# Altium PCB Interface.PcbDoc
Units mil, origin at the board's own origin, x right, y up, seen from the top; angles counter-clockwise.
Board outline 9055.12 x 3940 mil, 2 copper layers (Top Layer, Bottom Layer); 34 components, 85 nets, 292 pads, 110 vias.
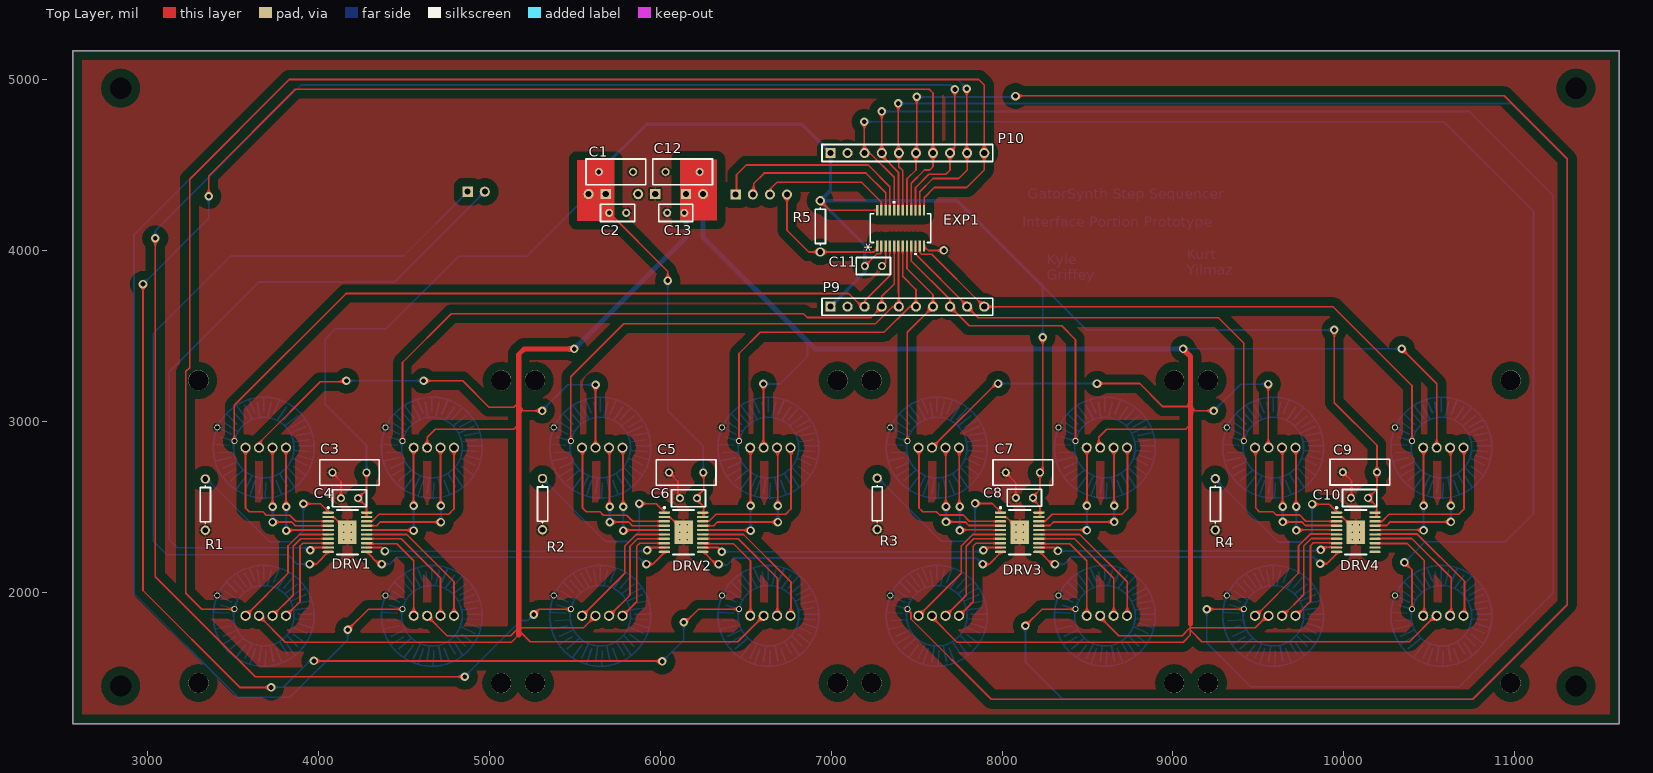
[diagram p0: Top Layer view]
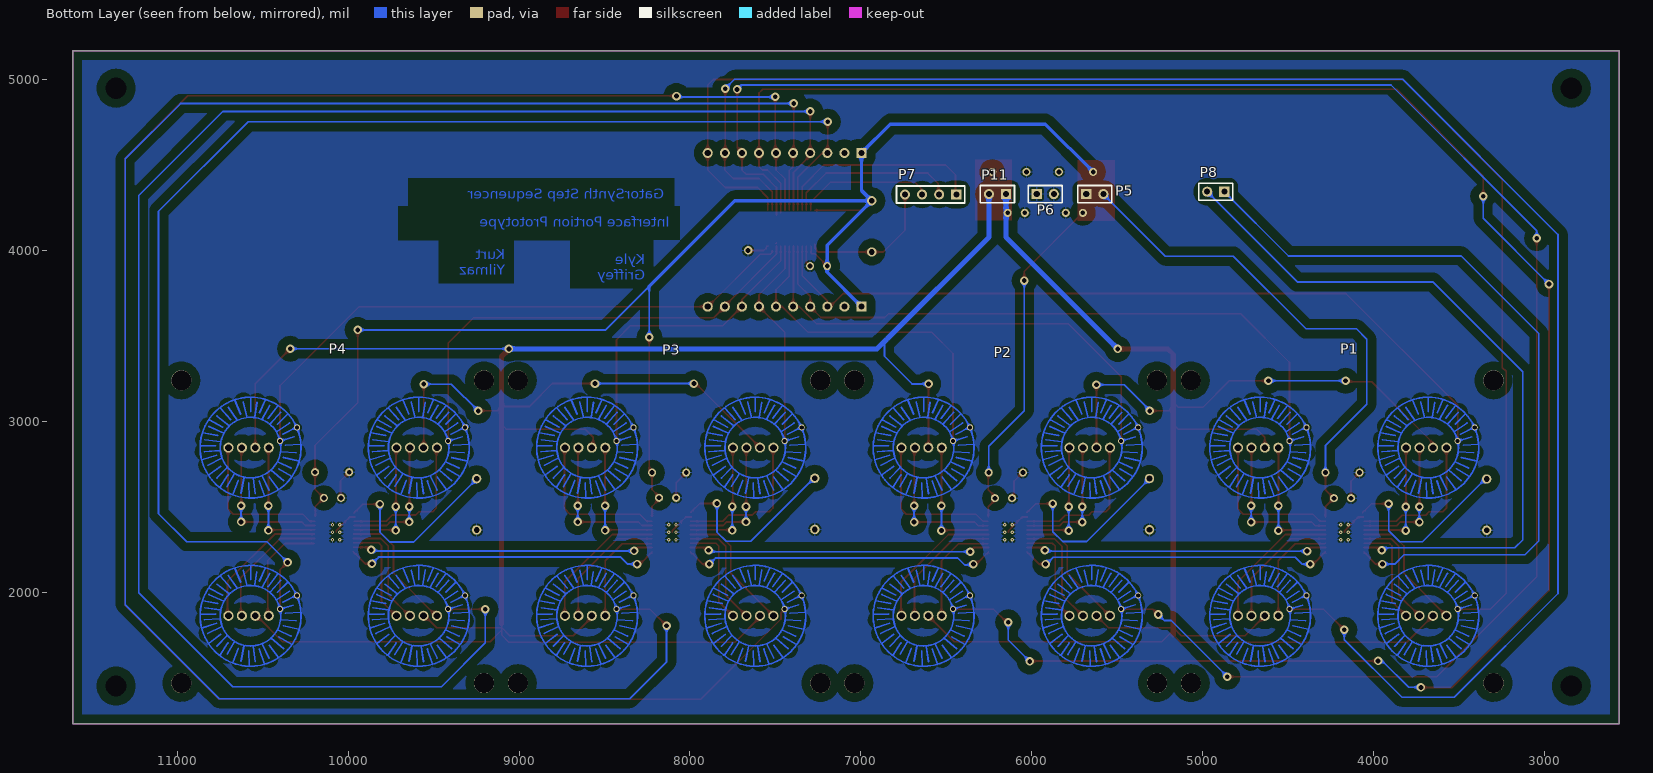
[diagram p1: Bottom Layer view, seen from below]

## Layer stack, top to bottom
Top Solder: solder mask 0.4, Solder Resist, Dk 3.5
Top Layer: signal copper 1.4
Dielectric 1: dielectric 12.6, FR-4, Dk 4.8
Bottom Layer: signal copper 1.4
Bottom Solder: solder mask 0.4, Solder Resist, Dk 3.5

## Board outline
2559.06,1230 11614.17,1230 11614.17,5170 2559.06,5170

## Design rules (kind name [scope] priority, off if disabled: settings)
Clearance "Copper pour vs GND" [InPolygon vs InNet('GND')] p1: gap=0 ignorepadtopadclearanceinfootprint=TRUE
Clearance "Copper pour" [InPolygon vs Not InNet(GND)] p2: gap=50 ignorepadtopadclearanceinfootprint=TRUE
Clearance [Not InPolygon vs Not InPolygon] p3: gap=10 ignorepadtopadclearanceinfootprint=TRUE
ComponentClearance Buttons_Clearance [HasFootprint('BUTTONPAD-2X2') vs HasFootprint('BUTTONPAD-2X2')] p1: gap=0 collisioncheckmode=3 verticalgap=0 showdistances=FALSE
ComponentClearance [All] p2: gap=10 collisioncheckmode=3 verticalgap=10 showdistances=FALSE
PolygonConnect [All] p1: connectstyle=Relief reliefconductorwidth=10 reliefentries=4 polygonreliefangle="90 Angle" airgapwidth=10
RoutingVias [All] p1: holewidth=28 width=50 viastyle="Through Hole" minholewidth=28 minwidth=50 maxholewidth=28 maxwidth=50
SolderMaskExpansion [All] p1: expansion=4
Width [All] p1: maxlimit=30 minlimit=10 preferedwidth=10
29 further rules are at their usual default settings.

## Components (designator, comment, footprint, x,y, rotation, side; value= is the part's Value field where it differs from the comment)
C1 "" RAD-0.2 5740,4460 r0 top value=10uF
C2 "Cap" RAD-0.1 5750,4220 r180 top value=".01 uF"
C3 "" RAD-0.2 4180,2700 r180 top value=10uF
C4 "Cap" RAD-0.1 4180,2550 r0 top value=".01 uF"
C5 "" RAD-0.2 6151,2700 r180 top value=10uF
C6 "Cap" RAD-0.1 6164.67,2550 r0 top value=".01 uF"
C7 "" RAD-0.2 8122,2700 r180 top value=10uF
C8 "Cap" RAD-0.1 8131,2552 r0 top value=".01 uF"
C9 "" RAD-0.2 10095,2702 r180 top value=10uF
C10 "Cap" RAD-0.1 10093,2551 r0 top value=".01 uF"
C11 "Cap" RAD-0.1 7247,3909 r0 top value=".047 uF"
C12 "" RAD-0.2 6130,4460 r180 top value=10uF
C13 "Cap" RAD-0.1 6090,4220 r0 top value=".01 uF"
DRV1 "TLC5971PWPR" TI-PWP20-2965X2290TP_N 4167.8,2350.43 r0 top
DRV2 "TLC5971PWPR" TI-PWP20-2965X2290TP_N 6135.6,2350.43 r0 top
DRV3 "TLC5971PWPR" TI-PWP20-2965X2290TP_N 8103.4,2350.43 r0 top
DRV4 "TLC5971PWPR" TI-PWP20-2965X2290TP_N 10071.2,2350.43 r0 top
EXP1 "MAX7314AEGT" 21-0055H_24 7406,4131 r90 top
P1 "BUTTONPAD" BUTTONPAD-2X2 3197.24,1374.25 r0 bottom locked
P2 "BUTTONPAD" BUTTONPAD-2X2 5167.24,1374.25 r0 bottom locked
P3 "BUTTONPAD" BUTTONPAD-2X2 7137.24,1374.25 r0 bottom locked
P4 "BUTTONPAD" BUTTONPAD-2X2 9107.24,1374.25 r0 bottom locked
P5 "VCC" HDR1X2 5680,4330 r180 bottom
P6 "GND" HDR1X2 5970,4330 r180 bottom
P7 "I2C" HDR1X4 6441,4328 r0 bottom
P8 "SPI" HDR1X2 4872,4344 r0 bottom
P9 "2.2k_RES" HDR1X10 6996,3671 r0 top
P10 "2.2k_RES" HDR1X10 6996,4571 r0 top
P11 "12V" HDR1X2 6150,4330 r0 bottom
R1 "R1" AXIAL-0.3 3336,2512 r90 top value=2.5K
R2 "R2" AXIAL-0.3 5310,2515 r90 top value=2.5K
R3 "R3" AXIAL-0.3 7269,2517 r90 top value=2.5K
R4 "R4" AXIAL-0.3 9249,2514 r90 top value=2.5K
R5 "R5" AXIAL-0.3 6936,4141 r90 top value=1K

## Footprints (in the part's own frame and the unit in brackets; to place one, negate y for a bottom-side part, rotate by r counter-clockwise, add the part's x,y. Pads: shape width x height; smd on the part's side, far side on the other; paste and mask are expansions set on the pad)
21-0055H_24 [mil]
  rect 63x14 smd: 1(-104.5,137.5) 2(-104.5,112.5) 3(-104.5,87.5) 4(-104.5,62.5) 5(-104.5,37.5) 6(-104.5,12.5) 7(-104.5,-12.5) 8(-104.5,-37.5) 9(-104.5,-62.5) 10(-104.5,-87.5) 11(-104.5,-112.5) 12(-104.5,-137.5) 13(104.5,-137.5) 14(104.5,-112.5) 15(104.5,-87.5) 16(104.5,-62.5) 17(104.5,-37.5) 18(104.5,-12.5) 19(104.5,12.5) 20(104.5,37.5) 21(104.5,62.5) 22(104.5,87.5) 23(104.5,112.5) 24(104.5,137.5)
  silkscreen extent -156,-177 156,177
AXIAL-0.3 [mm] "Axial Device, Thru-Hole; 2 Leads; 0.3 in Pin Spacing"
  round 1.4 hole 0.85: 1(-3.81,0) 2(3.81,0)
  silkscreen extent -2.77,-0.76 2.77,0.76
BUTTONPAD-2X2 [mm]
  round 3 hole 3: 1(2.508,-47.373) 1(2.508,-2.373) 1(47.508,-47.373) 1(47.508,-2.373)
  round 1.5 hole 1: BLU1(15.508,-37.373) BLU2(40.508,-37.373) BLU3(15.508,-12.373) BLU4(40.508,-12.373) GRN1(13.508,-37.373) GRN2(38.508,-37.373) GRN3(13.508,-12.373) GRN4(38.508,-12.373) RED1(9.508,-37.373) RED2(34.508,-37.373) RED3(9.508,-12.373) RED4(34.508,-12.373) VCC1(11.508,-37.373) VCC2(36.508,-37.373) VCC3(11.508,-12.373) VCC4(36.508,-12.373)
  round 0.9 hole 0.6: SIG1(5.296,-40.386) SIG2(7.836,-38.354) SIG3(30.296,-40.386) SIG4(32.836,-38.354) SIG5(5.296,-15.386) SIG6(7.836,-13.354) SIG7(30.296,-15.386) SIG8(32.836,-13.354)
  Top Layer circle w0.254: c37.208,-12.373 r7.5
  Top Layer circle w0.254: c37.208,-37.373 r7.5
  Top Layer circle w0.254: c12.208,-12.373 r7.5
  Top Layer circle w0.254: c12.208,-37.373 r7.5
  Top Layer lines w0.254: 4.728,-12.883 7.028,-12.743 ; 4.728,-37.883 7.028,-37.743 ; 5.048,-10.393 7.318,-10.903 ; 5.048,-35.393 7.318,-35.903 ; 5.368,-15.413 7.428,-14.373 ; 5.368,-40.413 7.428,-39.373 ; 5.448,-11.623 7.748,-11.763 ; 5.448,-36.623 7.748,-36.763 ; 5.731,-39.014 7.748,-38.373 ; 5.736,-14.012 7.748,-13.373 ; 6.138,-8.123 8.038,-9.243 ; 6.138,-33.123 8.038,-34.243 ; 6.198,-9.353 8.198,-10.293 ; 6.198,-34.353 8.198,-35.293 ; 6.438,-16.033 8.358,-14.753 ; 6.438,-41.033 8.358,-39.753 ; 6.708,-17.373 8.208,-15.873 ; 6.708,-42.373 8.208,-40.873 ; 7.288,-7.453 9.138,-9.003 ; 7.288,-32.453 9.138,-34.003 ; 7.768,-17.613 9.298,-15.923 ; 7.768,-42.613 9.298,-40.923 ; 8.118,-6.203 9.448,-8.003 ; 8.118,-31.203 9.448,-33.003 ; 8.198,-18.573 9.618,-16.733 ; 8.198,-43.573 9.618,-41.733 ; 9.358,-18.653 10.468,-16.673 ; 9.358,-43.653 10.468,-41.673 ; 9.478,-6.063 10.468,-8.153 ; 9.478,-31.063 10.468,-33.153 ; 10.048,-19.483 10.888,-17.553 ; 10.048,-44.483 10.888,-42.553 ; 10.178,-5.293 10.918,-7.423 ; 10.178,-30.293 10.918,-32.423 ; 11.243,-19.166 11.598,-16.943 ; 11.257,-44.081 11.598,-41.943 ; 11.498,-5.533 11.838,-7.803 ; 11.498,-30.533 11.838,-32.803 ; 12.208,-17.743 12.208,-19.833 ; 12.208,-42.743 12.208,-44.833 ; 12.428,-4.933 12.498,-7.163 ; 12.428,-29.933 12.498,-32.163 ; 12.798,-16.993 13.308,-19.163 ; 12.798,-41.993 13.308,-44.163 ; 13.198,-7.913 13.648,-5.613 ; 13.198,-32.913 13.648,-30.613 ; 13.708,-17.393 14.538,-19.403 ; 13.708,-42.393 14.538,-44.403 ; 14.058,-7.493 14.798,-5.563 ; 14.058,-32.493 14.798,-30.563 ; 14.188,-16.463 15.548,-18.383 ; 14.188,-41.463 15.548,-43.383 ; 14.618,-8.473 15.756,-6.604 ; 14.618,-33.473 15.756,-31.623 ; 15.178,-16.513 16.728,-18.283 ; 15.178,-41.513 16.728,-43.283 ; 15.388,-15.633 17.218,-17.073 ; 15.388,-40.633 17.218,-42.073 ; 15.578,-8.313 16.748,-6.573 ; 15.578,-33.313 16.748,-31.573 ; 15.708,-9.433 17.218,-7.853 ; 15.708,-34.433 17.218,-32.853 ; 16.188,-14.533 18.408,-15.523 ; 16.188,-39.533 18.408,-40.523 ; 16.348,-15.423 18.358,-16.493 ; 16.348,-40.423 18.358,-41.493 ; 16.508,-10.773 18.568,-9.753 ; 16.508,-35.773 18.568,-34.753 ; 16.618,-13.233 16.637,-13.235 ; 16.618,-38.233 16.637,-38.236 ; 16.648,-9.593 18.378,-8.313 ; 16.648,-34.593 18.378,-33.313 ; 16.808,-11.943 19.078,-11.783 ; 16.808,-36.943 19.078,-36.783 ; 17.098,-14.193 19.318,-14.613 ; 17.098,-39.193 19.318,-39.613 ; 17.258,-11.253 19.428,-10.553 ; 17.258,-36.253 19.428,-35.553 ; 17.388,-12.643 19.588,-12.613 ; 17.388,-37.643 19.588,-37.613 ; 19.018,-13.553 16.637,-13.235 ; 19.018,-38.553 16.637,-38.236 ; 29.728,-12.883 32.028,-12.743 ; 29.728,-37.883 32.028,-37.743 ; 30.048,-10.393 32.318,-10.903 ; 30.048,-35.393 32.318,-35.903 ; 30.368,-15.413 32.428,-14.373 ; 30.368,-40.413 32.428,-39.373 ; 30.448,-11.623 32.748,-11.763 ; 30.448,-36.623 32.748,-36.763 ; 30.748,-39.008 32.748,-38.373 ; 30.906,-13.958 32.748,-13.373 ; 31.138,-8.123 33.038,-9.243 ; 31.138,-33.123 33.038,-34.243 ; 31.198,-9.353 33.198,-10.293 ; 31.198,-34.353 33.198,-35.293 ; 31.438,-16.033 33.358,-14.753 ; 31.438,-41.033 33.358,-39.753 ; 31.708,-17.373 33.208,-15.873 ; 31.708,-42.373 33.208,-40.873 ; 32.288,-7.453 34.138,-9.003 ; 32.288,-32.453 34.138,-34.003 ; 32.768,-17.613 34.298,-15.923 ; 32.768,-42.613 34.298,-40.923 ; 33.118,-6.203 34.448,-8.003 ; 33.118,-31.203 34.448,-33.003 ; 33.198,-18.573 34.618,-16.733 ; 33.198,-43.573 34.618,-41.733 ; 34.358,-18.653 35.468,-16.673 ; 34.358,-43.653 35.468,-41.673 ; 34.478,-6.063 35.468,-8.153 ; 34.478,-31.063 35.468,-33.153 ; 35.048,-19.483 35.888,-17.553 ; 35.048,-44.483 35.888,-42.553 ; 35.178,-5.293 35.918,-7.423 ; 35.178,-30.293 35.918,-32.423 ; 36.257,-44.078 36.598,-41.943 ; 36.283,-18.916 36.598,-16.943 ; 36.498,-5.533 36.838,-7.803 ; 36.498,-30.533 36.838,-32.803 ; 37.208,-17.743 37.208,-19.833 ; 37.208,-42.743 37.208,-44.833 ; 37.428,-4.933 37.498,-7.163 ; 37.428,-29.933 37.498,-32.163 ; 37.798,-16.993 38.308,-19.163 ; 37.798,-41.993 38.308,-44.163 ; 38.198,-7.913 38.648,-5.613 ; 38.198,-32.913 38.648,-30.613 ; 38.708,-17.393 39.538,-19.403 ; 38.708,-42.393 39.538,-44.403 ; 39.058,-7.493 39.798,-5.563 ; 39.058,-32.493 39.798,-30.563 ; 39.188,-16.463 40.548,-18.383 ; 39.188,-41.463 40.548,-43.383 ; 39.618,-8.473 40.671,-6.67 ; 39.618,-33.473 40.741,-31.55 ; 40.178,-16.513 41.728,-18.283 ; 40.178,-41.513 41.728,-43.283 ; 40.388,-15.633 42.218,-17.073 ; 40.388,-40.633 42.218,-42.073 ; 40.578,-8.313 41.748,-6.573 ; 40.578,-33.313 41.748,-31.573 ; 40.708,-9.433 42.218,-7.853 ; 40.708,-34.433 42.218,-32.853 ; 41.188,-14.533 43.408,-15.523 ; 41.188,-39.533 43.408,-40.523 ; 41.348,-15.423 43.358,-16.493 ; 41.348,-40.423 43.358,-41.493 ; 41.508,-10.773 43.568,-9.753 ; 41.508,-35.773 43.568,-34.753 ; 41.618,-13.233 41.637,-13.235 ; 41.618,-38.233 41.637,-38.236 ; 41.648,-9.593 43.378,-8.313 ; 41.648,-34.593 43.378,-33.313 ; 41.808,-11.943 44.078,-11.783 ; 41.808,-36.943 44.078,-36.783 ; 42.098,-14.193 44.318,-14.613 ; 42.098,-39.193 44.318,-39.613 ; 42.258,-11.253 44.428,-10.553 ; 42.258,-36.253 44.428,-35.553 ; 42.388,-12.643 44.588,-12.613 ; 42.388,-37.643 44.588,-37.613 ; 44.018,-13.553 41.637,-13.235 ; 44.018,-38.553 41.637,-38.236 ; 16.637,-13.235 cw(c12.218,-12.383) 12.218,-7.883 cw(c12.218,-12.383) 16.637,-13.235 ; 16.637,-38.236 ccw(c12.218,-37.383) 12.218,-32.883 ccw(c12.218,-37.383) 16.637,-38.236 ; 41.637,-13.235 cw(c37.218,-12.383) 37.218,-7.883 cw(c37.218,-12.383) 41.637,-13.235 ; 41.637,-38.236 ccw(c37.218,-37.383) 37.218,-32.883 ccw(c37.218,-37.383) 41.637,-38.236
HDR1X2 [mm] "Connector; Header; 2 Position"
  rect 1.5x1.5 hole 0.9: 1(0,0)
  round 1.5 hole 0.9: 2(2.54,0)
  silkscreen extent -1.27,-1.27 3.81,1.27
HDR1X4 [mm] "Connector; Header; 4 Position"
  rect 1.5x1.5 hole 0.9: 1(0,0)
  round 1.5 hole 0.9: 2(2.54,0) 3(5.08,0) 4(7.62,0)
  silkscreen extent -1.27,-1.27 8.89,1.27
HDR1X10 [mm] "Connector; Header; 10 Position"
  rect 1.5x1.5 hole 0.9: 1(0,0)
  round 1.5 hole 0.9: 2(2.54,0) 3(5.08,0) 4(7.62,0) 5(10.16,0) 6(12.7,0) 7(15.24,0) 8(17.78,0) 9(20.32,0) 10(22.86,0)
  silkscreen extent -1.27,-1.27 24.13,1.27
RAD-0.1 [mm] "Radial Cap, Thru-Hole; 2 Leads; 0.1 in Pin Spacing"
  round 1.2 hole 0.7: 1(-1.27,0) 2(1.27,0)
  silkscreen extent -2.54,-1.27 2.54,1.27
RAD-0.2 [mm] "Radial Cap, Thru-Hole; 2 Leads; 0.2 in Pin Spacing"
  round 1.2 hole 0.7: 1(-2.54,0) 2(2.54,0)
  silkscreen extent -4.44,-1.91 4.44,1.91
TI-PWP20-2965X2290TP_N [mm] "SOP, 20-Leads, Body 6.5x4.4mm, Pitch 0.65mm, Thermal Pad 2.965x2.29mm, IPC Medium Density"
  oval 1.7x0.35 smd: 1(-2.85,2.925) 2(-2.85,2.275) 3(-2.85,1.625) 4(-2.85,0.975) 5(-2.85,0.325) 6(-2.85,-0.325) 7(-2.85,-0.975) 8(-2.85,-1.625) 9(-2.85,-2.275) 10(-2.85,-2.925) 11(2.85,-2.925) 12(2.85,-2.275) 13(2.85,-1.625) 14(2.85,-0.975) 15(2.85,-0.325) 16(2.85,0.325) 17(2.85,0.975) 18(2.85,1.625) 19(2.85,2.275) 20(2.85,2.925)
  rect 2.75x3.43 smd: 21(0,0)
  silkscreen extent -2.97,-3.3 1.6,3.77, body extent -2.25,-3.3 2.25,3.3, height 1.2

## Part data
C1 C3 C5 C7 C9 C12: library part "Cap Pol2", "Polarized Capacitor (Axial)", LatestRevisionDate=17-Jul-2002, LatestRevisionNote="Re-released for DXP Platform.", PackageDescription="Polarized Capacitor; 2 Leads", PackageReference=POLAR0.8, Published=8-Jun-2000, Publisher="Altium Limited"
C2 C4 C6 C8 C10 C11 C13: "Capacitor", LatestRevisionDate=17-Jul-2002, LatestRevisionNote="Re-released for DXP Platform.", PackageDescription="Radial Cap, Thru-Hole; 2 Leads; 0.3 in Pin Spacing", PackageReference=RAD-0.3, Published=8-Jun-2000, Publisher="Altium Limited"
DRV1 DRV2 DRV3 DRV4: "12-Channel, 16-Bit ES-PWM RGB LED Driver with 3.3 V Linear Regulator, 6 to 17 V, -40 to 85 degC, 20-pin SOP (PWP20), Green (RoHS & no Sb/Br)", Manufacturer="Texas Instruments", Rating=Catalog, Supplier Part Number 1=296-27796-2-ND, Code_JEDEC=MO-153, ComponentLink1Description="Manufacturer URL", ComponentLink1URL=http://www.ti.com/, ComponentLink2Description=Datasheet, ComponentLink2URL=http://www.ti.com/general/docs/lit/getliterature.tsp?genericPartNumber=TLC5971&fileType=pdf, ComponentLink3Description="Package Specification", ComponentLink3URL=http://www.ti.com/litv/pdf/mhts001g, DatasheetVersion=SBVS146C, Eco-Plan="Green (RoHS & no Sb/Br)", Mounting Technology="Surface Mount", PackageDescription="20-Lead, Plastic Small Outline, Body Size 4.4 x 6.5 mm, Pitch 0.65 mm", PackageReference=PWP20-2965X2290TP, PackageVersion=4073225-4/I, PartNumber=TLC5971PWPR, SubFamily="LED Driver", Supplier 1=Digi-Key, Supplier 2=Digi-Key, Supplier 3=Digi-Key, Supplier 4=Newark, Supplier 5=Mouser, Supplier Part Number 2=296-27796-1-ND, Supplier Part Number 3=296-27796-6-ND, Supplier Part Number 4=01T0730, Supplier Part Number 5=595-TLC5971PWPR, Vin(Max)(V)=17, Vin(Min)(V)=6
EXP1: "Interface IC - I/O extensions Maxim Integrated MAX7314AEG%2B PWM I%C2%B2C 400 kHz QSOP 24", Package="QSOP-24 Maxim Integrated", Availability=Bad, MF="Maxim Integrated", MP=MAX7314AEG+, Price="2.82 USD"
P1 P2 P3 P4: library part BUTTONPAD-2X2, "5mm Button PadProven layout and schematic for 2x2 button pad. Panelize this device/fp to a 4x4 pad if needed. Spark Fun Electronics SKU : COM-07835. Compatible common cathode tri-color LED SKU : COM-00105"
P5 P6 P8 P11: library part "Header 2", "Header, 2-Pin", LatestRevisionDate=17-Jul-2002, LatestRevisionNote="Re-released for DXP Platform.", Publisher="Altium Limited"
P7: library part "Header 4", "Header, 4-Pin", LatestRevisionDate=17-Jul-2002, LatestRevisionNote="Re-released for DXP Platform.", Publisher="Altium Limited"
P9 P10: library part "Header 10", "Header, 10-Pin", LatestRevisionDate=17-Jul-2002, LatestRevisionNote="Re-released for DXP Platform.", Publisher="Altium Limited"
R1 R2 R3 R4 R5: library part Res1, "Resistor", LatestRevisionDate=17-Jul-2002, LatestRevisionNote="Re-released for DXP Platform.", PackageDescription="Axial Device, Thru-Hole; 2 Leads; 0.3 in Pin Spacing", PackageReference=AXIAL-0.3, Published=8-Jun-2000, Publisher="Altium Limited"

## Free pads (board coordinates)
  round 60 hole 125: 1(11360,4950) 5(11360,1450) 6(2840,1450) 7(2840,4950)

## Via types
v1: diameter 50, hole 28, Top Layer to Bottom Layer, 86 vias
v2: diameter 19.68, hole 7.87, Top Layer to Bottom Layer, 24 vias

## Nets (pads, with @x,y where several pads share a name; then routed paths per layer and width w, separated by ;. In a path a pad name is that pad's centre, name@x,y a point inside that pad or via, vN(x,y) a via of type N, cw(c..) or ccw(c..) an arc to the next point about the centre after c; other vN are vias at no path point)
1.27V: 
3.3V: C1.1 C2.2 C3.1 C4.2 C5.1 C6.2 C7.1 C8.2 C9.1 C10.2 C11.1 DRV1.19 DRV1.20 DRV2.19 DRV2.20 DRV3.19 DRV3.20 DRV4.19 DRV4.20 EXP1.2 EXP1.24 P5.1 P5.2 P9.1 P10.1 R5.2 | length 14279.3
  Top Layer w10: DRV1.19 DRV1.20 4280,2500 C4.2 4280,2600 C3.1 ; C2.2 6043,3877 v1(6043,3824) ; DRV2.19@6253,2440 6253,2500 6203,2550 6253,2600 C5.1@6253,2700 ; R5.2 6991.5,4235.5 EXP1.24 ; P9.1@6996,3681 P9.1@6996,3691 ; C11.1 7268,3980 7290.5,3980 7290.5,4023.5 EXP1.2 ; DRV3.19@8222,2441 8222,2501 8172,2551 8222,2601 C7.1 8238,2716 v1(8238,3492) ; v1(9945,3535) 9945,3109 10195,2859 C9.1 10195,2603 C10.2 10193,2501 DRV4.19@10193,2441
  Bottom Layer w10: C3.1 4280,2857 4038,3099 4038,3481 4098,3541 4394,3541 4820,3967 5217,3967 P5.2 ; v1(6043,3824) 6043,3062 6251,2854 C5.1 ; v1(8238,3492) 8238,3790 8493,3535 v1(9945,3535)
  Bottom Layer w20: C1.1 5920,4740 6827,4740 P10.1 6996,4351 R5.2 ; P9.1 7197,3872 C11.1 7197,4030 R5.2 ; 8238,3790 7737,4291 R5.2
12V: C12.1 C13.2 P1.VCC1 P1.VCC2 P1.VCC3 P1.VCC4 P2.VCC1 P2.VCC2 P2.VCC3 P2.VCC4 P3.VCC1 P3.VCC2 P3.VCC3 P3.VCC4 P4.VCC1 P4.VCC2 P4.VCC3 P4.VCC4 P11.1 P11.2 | length 25937.4
  Top Layer w10: P1.VCC3 3804.7,1707 5128,1707 5169.5,1748.5 5169.5,1814 5171,1812.5 5172,1811.5 ; P1.VCC1 3650.32,2873.32 4009,3232 4157,3232 v1(4162,3237) ; v1(4614,3237) 4842,3237 4997,3082 5141.5,3082 5169.5,3110 ; P1.VCC4 4750.95,1745 5123,1745 5165,1787 ; P1.VCC2 4634.57,2906.57 4682,2954 5145,2954 5145,2956 5163,2974 ; 5169.5,3088 5171,3086.5 5196.5,3061 v1(5308,3061) ; 5174,1774 5238,1710 6453.19,1710 P2.VCC4 ; 5174,1791 5549.94,1791 P2.VCC3 ; P2.VCC1 v1(5620.32,3213.68) ; P2.VCC2@6603.32,2850.63 v1(6603.32,3218.68) ; P3.VCC1@7576.48,2859.47 7604.16,2859.47 7965.69,3221 v1(7977,3221) ; P3.VCC3@7582.32,1861.38 7736.7,1707 9060,1707 9101.5,1748.5 9101.5,1814 9103,1812.5 ; v1(8556,3221) 8806,3221 8941,3086 9085.5,3086 9103,3103.5 9113.5,3114 ; P3.VCC4@8566.57,1861.38 8682.95,1745 9055,1745 9097,1787 ; P3.VCC2@8566.57,2845.63 8566.57,2906.57 8614,2954 9077,2954 9077,2956 9095,2974 ; 9103,3086.5 9128.5,3061 v1(9240,3061) ; 9106,1774 9170,1710 10385.19,1710 P4.VCC4@10536.57,1861.38 ; 9106,1791 9481.94,1791 P4.VCC3@9552.32,1861.38 ; P4.VCC1@9558.32,2849.63 v1(9558.32,3217.68) ; v1(10340.5,3424.5) 10544.57,3220.43 P4.VCC2
  Top Layer w30: 5171,1748.5 5171,1812.5 5171,3086.5 5171,3392 5202.5,3423.5 v1(5495.5,3423.5) ; v1@9065,3417 9103,3379 9103,3103.5 9103,3086.5 9103,1812.5
  Bottom Layer w10: v1(4162,3237) v1(4614,3237) ; v1@5300,3055 5458.68,3213.68 v1(5620.32,3213.68) ; v1(6603.32,3218.68) 6699.68,3218.68 6861,3380 6861,3467 6843.5,3484.5 ; v1(7977,3221) v1(8556,3221) ; v1(9060,3424) 9060.5,3424.5 v1(10340.5,3424.5) ; v1(9240,3061) 9396.68,3217.68 v1(9558.32,3217.68)
  Bottom Layer w30: v1(5495.5,3423.5) 6150,4078 ; 6150,4079 P11.1 ; P11.2 6250,4078 6843.5,3484.5 ; 6850,3479 6905,3424 v1(9060,3424)
BLU1: DRV1.5 P1.BLU1 | length 733.5
  Top Layer w10: P1.BLU1 3807.8,2502.2 v1(3810,2500) ; v1(3810,2360) 3813.23,2363.23 DRV1.5
  Bottom Layer w10: v1(3810,2360) v1(3810,2500)
BLU2: DRV1.18 P1.BLU2 | length 900.7
  Top Layer w10: DRV1.18 4311.94,2414.41 4352.53,2455 4760,2455 4792.05,2487.05 P1.BLU2
BLU3: DRV2.5 P2.BLU1 | length 733.5
  Top Layer w10: P2.BLU1@5780.8,2845.63 5780.8,2502.2 v1(5783,2500) ; v1(5783,2360) 5786.23,2363.23 DRV2.5 DRV2.5@6028.59,2363.23
  Bottom Layer w10: v1(5783,2360) v1(5783,2500)
BLU4: DRV2.18 P2.BLU2 | length 900.7
  Top Layer w10: DRV2.18@6253,2414.41 6284.94,2414.41 6325.53,2455 6733,2455 6765.05,2487.05 P2.BLU2@6765.05,2845.63
BLU5: DRV3.5 P3.BLU1 | length 733.5
  Top Layer w10: P3.BLU1@7749.8,2846.63 7749.8,2503.2 v1(7752,2501) ; v1(7752,2361) 7755.23,2364.23 DRV3.5@7997.59,2364.23
  Bottom Layer w10: v1(7752,2361) v1(7752,2501)
BLU6: DRV3.18 P3.BLU2 | length 900.7
  Top Layer w10: DRV3.18@8222,2415.41 8253.94,2415.41 8294.53,2456 8702,2456 8734.05,2488.05 P3.BLU2@8734.05,2846.63
BLU7: DRV4.5 P4.BLU1 | length 733.5
  Top Layer w10: P4.BLU1@9720.8,2846.63 9720.8,2503.2 v1(9723,2501) ; v1(9723,2361) 9726.23,2364.23 DRV4.5@9968.59,2364.23
  Bottom Layer w10: v1(9723,2361) v1(9723,2501)
BLU8: DRV4.18 P4.BLU2 | length 900.7
  Top Layer w10: DRV4.18@10193,2415.41 10224.94,2415.41 10265.53,2456 10673,2456 10705.05,2488.05 P4.BLU2@10705.05,2846.63
BLU9: DRV1.8 P1.BLU3 | length 615.1
  Top Layer w10: P1.BLU3 3890,1943.58 3890,2270 3906.46,2286.46 DRV1.8
BLU10: DRV1.15 P1.BLU4 | length 825.6
  Top Layer w10: DRV1.15 4514.36,2337.64 4792.05,2059.95 P1.BLU4
BLU11: DRV2.8 P2.BLU3 | length 615.1
  Top Layer w10: P2.BLU3@5779.8,1861.38 5862,1943.58 5862,2270 5878.46,2286.46 DRV2.8 DRV2.8@6027.59,2286.46
BLU12: DRV2.15 P2.BLU4 | length 825.6
  Top Layer w10: DRV2.15@6252,2337.64 6486.36,2337.64 6764.05,2059.95 P2.BLU4@6764.05,1861.38
BLU13: DRV3.8 P3.BLU3 | length 615.1
  Top Layer w10: P3.BLU3@7748.8,1861.38 7831,1943.58 7831,2270 7847.46,2286.46 DRV3.8@7996.59,2286.46
BLU14: DRV3.15 P3.BLU4 | length 825.6
  Top Layer w10: DRV3.15@8221,2337.64 8455.36,2337.64 8733.05,2059.95 P3.BLU4@8733.05,1861.38
BLU15: DRV4.8 P4.BLU3 | length 615.1
  Top Layer w10: P4.BLU3@9723.8,1863.38 9806,1945.58 9806,2272 9822.46,2288.46 DRV4.8@9971.59,2288.46
BLU16: DRV4.15 P4.BLU4 | length 825.6
  Top Layer w10: DRV4.15@10196,2339.64 10430.36,2339.64 10708.05,2061.95 P4.BLU4@10708.05,1863.38
"EXTRA IN": EXP1.21 P7.1 | length 1236.5
  Top Layer w10: P7.1@6446,4318 6446,4443 6503,4500 7217,4500 7343.5,4373.5 EXP1.21
GND: C1.2 C2.1 C3.2 C4.1 C5.2 C6.1 C7.2 C8.1 C9.2 C10.1 C11.2 C12.2 C13.1 DRV1.2 DRV1.21 DRV2.2 DRV2.21 DRV3.2 DRV3.21 DRV4.2 DRV4.21 EXP1.3 EXP1.12 P1.SIG1 P1.SIG3 P1.SIG5 P1.SIG7 P2.SIG1 P2.SIG3 P2.SIG5 P2.SIG7 P3.SIG1 P3.SIG3 P3.SIG5 P3.SIG7 P4.SIG1 P4.SIG3 P4.SIG5 P4.SIG7 P6.1 P6.2 R1.1 R2.1 R3.1 R4.1 | length 1568.3
  Top Layer w10: DRV1.2 4087.53,2440 4167.8,2359.74 DRV1.21 ; C3.2 4130,2650 C4.1 ; DRV2.2 6055.34,2440 6135.6,2359.74 DRV2.21 ; C5.2@6053,2700 6103,2650 C6.1@6103,2550 ; C11.2 7318.5,3930.5 EXP1.3 ; EXP1.12 7570,4000 v1(7660,4000) ; DRV3.2 8023.14,2440 8103.4,2359.74 DRV3.21 ; C7.2 8081,2641 C8.1 ; DRV4.2 9990.94,2440 10071.2,2359.74 DRV4.21 ; C9.2 10046,2651 10046,2554 C10.1
  Bottom Layer w30: P4.SIG1@9310,2970 P4.SIG1
  other v2: 4146.14,2307.13 4189.45,2307.13 6113.94,2307.13 6157.25,2307.13 8081.75,2307.12 8125.06,2307.12 10049.55,2307.12 10092.86,2307.12 4146.14,2350.43 4189.45,2350.43 6113.94,2350.43 6157.25,2350.43 8081.75,2350.43 8125.06,2350.43 10049.55,2350.43 10092.86,2350.43 4146.14,2393.74 4189.45,2393.74 6113.94,2393.74 6157.25,2393.74 8081.75,2393.74 8125.06,2393.74 10049.55,2393.74 10092.86,2393.74
GRN1: DRV1.4 P1.GRN1 | length 770.4
  Top Layer w10: P1.GRN1 3729.06,2500.94 v1(3730,2500) ; v1(3730,2410) 3841.72,2410 3862.9,2388.82 DRV1.4
  Bottom Layer w10: v1(3730,2410) v1(3730,2500)
GRN2: DRV1.17 P1.GRN2 | length 878.5
  Top Layer w10: DRV1.17 4338.82,2388.82 4360,2410 v1(4715,2410) ; v1@4713.31,2500.94 P1.GRN2
  Bottom Layer w10: v1(4715,2410) v1@4715,2500
  other v1: 4715,2505
GRN3: DRV2.4 P2.GRN1 | length 770.4
  Top Layer w10: P2.GRN1@5702.06,2845.63 5702.06,2500.94 v1(5703,2500) ; v1(5703,2410) 5814.72,2410 5835.9,2388.82 DRV2.4 DRV2.4@6028.59,2388.82
  Bottom Layer w10: v1(5703,2410) v1(5703,2500)
GRN4: DRV2.17 P2.GRN2 | length 878.5
  Top Layer w10: DRV2.17@6253,2388.82 6311.82,2388.82 6333,2410 v1(6688,2410) ; v1@6686.31,2500.94 P2.GRN2@6686.31,2845.63
  Bottom Layer w10: v1(6688,2410) v1@6688,2500
  other v1: 6688,2505
GRN5: DRV3.4 P3.GRN1 | length 770.4
  Top Layer w10: P3.GRN1@7671.06,2846.63 7671.06,2501.94 v1(7672,2501) ; v1(7672,2411) 7783.72,2411 7804.9,2389.82 DRV3.4@7997.59,2389.82
  Bottom Layer w10: v1(7672,2411) v1(7672,2501)
GRN6: DRV3.17 P3.GRN2 | length 878.5
  Top Layer w10: DRV3.17@8222,2389.82 8280.82,2389.82 8302,2411 v1(8657,2411) ; v1@8655.31,2501.94 P3.GRN2@8655.31,2846.63
  Bottom Layer w10: v1(8657,2411) v1@8657,2501
  other v1: 8657,2506
GRN7: DRV4.4 P4.GRN1 | length 770.4
  Top Layer w10: P4.GRN1@9642.06,2846.63 9642.06,2501.94 v1(9643,2501) ; v1(9643,2411) 9754.72,2411 9775.9,2389.82 DRV4.4@9968.59,2389.82
  Bottom Layer w10: v1(9643,2411) v1(9643,2501)
GRN8: DRV4.17 P4.GRN2 | length 878.5
  Top Layer w10: DRV4.17@10193,2389.82 10251.82,2389.82 10273,2411 v1(10628,2411) ; v1@10626.31,2501.94 P4.GRN2@10626.31,2846.63
  Bottom Layer w10: v1(10628,2411) v1@10628,2501
  other v1: 10628,2506
GRN9: DRV1.7 P1.GRN3 | length 680.6
  Top Layer w10: P1.GRN3 3850,1982.32 3850,2268 3894.05,2312.05 DRV1.7
GRN10: DRV1.14 P1.GRN4 | length 749
  Top Layer w10: DRV1.14 4482.95,2312.05 4713.31,2081.69 P1.GRN4
GRN11: DRV2.7 P2.GRN3 | length 680.6
  Top Layer w10: P2.GRN3@5701.06,1861.38 5822,1982.32 5822,2268 5866.05,2312.05 DRV2.7 DRV2.7@6027.59,2312.05
GRN12: DRV2.14 P2.GRN4 | length 749
  Top Layer w10: DRV2.14@6252,2312.05 6454.95,2312.05 6685.31,2081.69 P2.GRN4@6685.31,1861.38
GRN13: DRV3.7 P3.GRN3 | length 680.6
  Top Layer w10: P3.GRN3@7670.06,1861.38 7791,1982.32 7791,2268 7835.05,2312.05 DRV3.7@7996.59,2312.05
GRN14: DRV3.14 P3.GRN4 | length 749
  Top Layer w10: DRV3.14@8221,2312.05 8423.95,2312.05 8654.31,2081.69 P3.GRN4@8654.31,1861.38
GRN15: DRV4.7 P4.GRN3 | length 680.6
  Top Layer w10: P4.GRN3@9645.06,1863.38 9766,1984.32 9766,2270 9810.05,2314.05 DRV4.7@9971.59,2314.05
GRN16: DRV4.14 P4.GRN4 | length 749
  Top Layer w10: DRV4.14@10196,2314.05 10398.95,2314.05 10629.31,2083.69 P4.GRN4@10629.31,1863.38
INTERRUPT: EXP1.1 P7.4 R5.1 | length 825.2
  Top Layer w10: P7.4 6741,4118 6868,3991 R5.1 7249,3991 7268,4010 7268,4036.35 EXP1.1@7269,4037.35
MOSI: DRV1.9 P8.2 | length 4256.3
  Top Layer w10: v1@3952,2226.66 3960,2234.66 v1(3950,2244.66) 3966.2,2260.87 DRV1.9
  Bottom Layer w10: v1(3950,2244.66) 3935.66,2259 3171,2259 3125,2305 3125,3290 3651,3816 4444,3816 P8.2
NetDRV1_1: DRV1.1 R1.2 | length 1078.8
  Top Layer w10: v1(3910,2517) 4010.18,2517 DRV1.1@4062.59,2464.59
  Bottom Layer w10: R1.2@3342.5,2664.5 3712,2295 3845,2295 3910,2360 v1(3910,2517)
NetDRV2_1: DRV2.1 R2.2 | length 1082.9
  Top Layer w10: v1(5876,2518) 5976.18,2518 DRV2.1@6028.59,2465.59
  Bottom Layer w10: R2.2@5308.5,2665.5 5678,2296 5818,2296 5876,2354 v1(5876,2518)
NetDRV3_1: DRV3.1 R3.2 | length 1085.2
  Top Layer w10: v1(7842,2519) 7942.18,2519 DRV3.1@7994.59,2466.59
  Bottom Layer w10: R3.2@7274.5,2666.5 7644,2297 7788,2297 7842,2351 v1(7842,2519)
NetDRV4_1: DRV4.1 R4.2 | length 1082.9
  Top Layer w10: v1(9815,2515) 9915.18,2515 DRV4.1@9967.59,2462.59
  Bottom Layer w10: R4.2@9247.5,2662.5 9617,2293 9757,2293 9815,2351 v1(9815,2515)
NetU1_42: 
RED1: DRV1.3 P1.RED1 | length 870
  Top Layer w10: P1.RED1 3571.58,2491.58 3593.16,2470 3673.43,2470 3693.43,2450 3830,2450 3865.59,2414.41 DRV1.3
RED2: DRV1.16 P1.RED2 | length 781.9
  Top Layer w10: DRV1.16 4551.77,2363.23 v1(4555,2360) ; v1(4555,2505) P1.RED2@4555,2848.43 ; P1.RED2 P1.RED2@4570,2859.8
  Bottom Layer w10: v1(4555,2505) 4555,2370 v1@4560,2365
RED3: DRV2.3 P2.RED1 | length 870
  Top Layer w10: P2.RED1@5544.58,2845.63 5544.58,2491.58 5566.16,2470 5646.43,2470 5666.43,2450 5803,2450 5838.59,2414.41 DRV2.3 DRV2.3@6028.59,2414.41
RED4: DRV2.16 P2.RED2 | length 761.8
  Top Layer w10: DRV2.16@6253,2363.23 6524.77,2363.23 v1(6528,2360) ; v1(6528,2505) P2.RED2@6528,2848.43
  Bottom Layer w10: v1(6528,2505) 6528,2370 v1@6533,2365
RED5: DRV3.3 P3.RED1 | length 870
  Top Layer w10: P3.RED1@7513.58,2846.63 7513.58,2492.58 7535.16,2471 7615.43,2471 7635.43,2451 7772,2451 7807.59,2415.41 DRV3.3@7997.59,2415.41
RED6: DRV3.16 P3.RED2 | length 761.8
  Top Layer w10: DRV3.16@8222,2364.23 8493.77,2364.23 v1(8497,2361) ; v1(8497,2506) P3.RED2@8497,2849.43
  Bottom Layer w10: v1(8497,2506) 8497,2371 v1@8502,2366
RED7: DRV4.3 P4.RED1 | length 870
  Top Layer w10: P4.RED1@9484.58,2846.63 9484.58,2492.58 9506.16,2471 9586.43,2471 9606.43,2451 9743,2451 9778.59,2415.41 DRV4.3@9968.59,2415.41
RED8: DRV4.16 P4.RED2 | length 761.8
  Top Layer w10: DRV4.16@10193,2364.23 10464.77,2364.23 v1(10468,2361) ; v1(10468,2506) P4.RED2@10468,2849.43
  Bottom Layer w10: v1(10468,2506) 10468,2371 v1@10473,2366
RED9: DRV1.6 P1.RED3 | length 775.1
  Top Layer w10: P1.RED3 3820,2109.8 3820,2270 3887.64,2337.64 DRV1.6
RED10: DRV1.13 P1.RED4 | length 640.4
  Top Layer w10: DRV1.13 4283.7,2282.76 4456.24,2282.76 4555.83,2183.17 P1.RED4
RED11: DRV2.6 P2.RED3 | length 775.1
  Top Layer w10: P2.RED3@5543.58,1861.38 5792,2109.8 5792,2270 5859.64,2337.64 DRV2.6 DRV2.6@6027.59,2337.64
RED12: DRV2.13 P2.RED4 | length 635.2
  Top Layer w10: DRV2.13@6255.7,2282.76 6428.24,2282.76 6527.83,2183.17 P2.RED4@6527.83,1861.38
RED13: DRV3.6 P3.RED3 | length 775.1
  Top Layer w10: P3.RED3@7512.58,1861.38 7761,2109.8 7761,2270 7828.64,2337.64 DRV3.6@7996.59,2337.64
RED14: DRV3.13 P3.RED4 | length 635.2
  Top Layer w10: DRV3.13@8224.7,2282.76 8397.24,2282.76 8496.83,2183.17 P3.RED4@8496.83,1861.38
RED15: DRV4.6 P4.RED3 | length 775.1
  Top Layer w10: P4.RED3@9487.58,1863.38 9736,2111.8 9736,2272 9803.64,2339.64 DRV4.6@9971.59,2339.64
RED16: DRV4.13 P4.RED4 | length 635.2
  Top Layer w10: DRV4.13@10199.7,2284.76 10372.24,2284.76 10471.83,2185.17 P4.RED4@10471.83,1863.38
SCKO1: DRV1.11 DRV2.10 | length 1842.8
  Top Layer w10: DRV1.11 4351.28,2164 v1(4369,2164) ; v1(5918,2164) 5956.32,2164 DRV2.10@6027.59,2235.28
  Bottom Layer w10: v1@4361,2163 4416,2163 4457,2204 5874,2204 v1@5913,2165
SCKO2: DRV2.11 DRV3.10 | length 1825.1
  Top Layer w10: DRV2.11@6252,2235.28 v1@6323.28,2164 ; v1(7887,2164) 7925.32,2164 DRV3.10@7996.59,2235.28
  Bottom Layer w10: v1@6337,2159 6392,2159 6433,2200 7850,2200 v1@7889,2161
  other v1: 6341,2164
SCKO3: DRV3.11 DRV4.10 | length 1825.1
  Top Layer w10: DRV3.11@8221,2235.28 v1@8292.28,2164 ; v1(9862,2166) 9900.32,2166 DRV4.10@9971.59,2237.28
  Bottom Layer w10: v1(8310,2164) 8365,2164 8406,2205 9823,2205 v1(9862,2166)
SCL: EXP1.22 P7.2 | length 1012.2
  Top Layer w10: P7.2@6546,4328 6546,4392 6607,4453 7204,4453 7318.5,4338.5 EXP1.22
SDA: EXP1.23 P7.3 | length 794.1
  Top Layer w10: P7.3@6646,4328 6646,4363 6683,4400 7177,4400 7293.5,4283.5 EXP1.23
SDTO1: DRV1.12 DRV2.9 | length 1738.4
  Top Layer w10: DRV1.12 4366.13,2260.87 v1(4387,2240) ; v1@5938.2,2260.87 DRV2.9 DRV2.9@6027.59,2260.87
  Bottom Layer w10: v1@4378,2240 v1(4387,2240) v1@5911.34,2240
  other v1: 5922,2244.66
SDTO2: DRV2.12 DRV3.9 | length 1742.4
  Top Layer w10: DRV2.12@6252,2260.87 6338.13,2260.87 6359,2240 v1(6359,2236) ; v1@7907.2,2260.87 DRV3.9@7996.59,2260.87
  Bottom Layer w10: v1@6354,2236 v1(6359,2236) v1@7887.34,2236
  other v1: 7891,2244.66
SDTO3: DRV3.12 DRV4.9 | length 1745
  Top Layer w10: DRV3.12@8221,2260.87 8307.13,2260.87 v1(8327,2241) ; v1@9882.2,2262.87 DRV4.9@9971.59,2262.87
  Bottom Layer w10: v1(8327,2241) 9860.34,2241 v1(9866,2246.66)
SPCK: DRV1.10 P8.1 | length 4509.8
  Top Layer w10: v1(3946,2164) 3984.32,2164 DRV1.10
  Bottom Layer w10: v1(3946,2164) 3874,2164 3820,2218 3112,2218 3031,2299 3031,3514 3485,3968 4496,3968 P8.1
SW1: EXP1.4 P1.SIG2 P9.3 | length 4619.2
  Top Layer w10: P1.SIG2 3505.75,3093.75 4160,3748 7103,3748 7180,3671 P9.3 7196,3705 7343.5,3852.5 EXP1.4
SW2: EXP1.5 P1.SIG4 P9.4 | length 3794.5
  Top Layer w10: P1.SIG4 4490,3344 4775.5,3629.5 6837.5,3629.5 6859,3608 7233,3608 P9.4 ; P9.4@7296,3681 7296,3731 7368.5,3803.5 EXP1.5
SW3: EXP1.6 P2.SIG2 P9.5 | length 2813.8
  Top Layer w10: P2.SIG2 5475.75,3261.75 5785,3571 7258.97,3571 7358.97,3671 P9.5 ; EXP1.6 7393.5,3753.5 7396,3751 P9.5@7396,3681
SW4: EXP1.7 P2.SIG4 P9.6 | length 2039.8
  Top Layer w10: P2.SIG4 6460,3397 6584,3521 7308.97,3521 7458.97,3671 P9.6 ; EXP1.7 7418.5,3848.5 7496,3771 P9.6@7496,3681
SW5: EXP1.8 P3.SIG2 P9.7 | length 1258.4
  Top Layer w10: EXP1.8@7444,4026 EXP1.8 7443.5,3893.5 7596,3741 P9.7@7596,3681 ; P3.SIG2 7445.75,3520.75 P9.7
SW6: EXP1.9 P3.SIG4 P9.8 | length 1847.2
  Top Layer w10: EXP1.9@7469,4026.5 7469,3938 7696,3711 P9.8@7696,3681 ; P9.8 7808,3559 8349,3559 8430,3478 P3.SIG4
SW7: EXP1.10 P4.SIG2 P9.9 | length 2760.5
  Top Layer w10: EXP1.10 7494,4026.5 7494,3977.4 7790.4,3681 P9.9@7796,3681 ; EXP1.10@7493.5,4043.5 EXP1.10@7496.5,4040.5 ; P9.9 7860,3607 9267,3607 9415.75,3458.25 P4.SIG2
SW8: EXP1.11 P4.SIG4 P9.10 | length 3537.4
  Top Layer w10: EXP1.11@7519,4001 7519,3987.75 7529.25,3977.5 7589.5,3977.5 7886,3681 P9.10@7896,3681 ; P9.10 9938,3671 10400,3209 P4.SIG4
SW9: EXP1.13 P1.SIG6 P10.10 | length 8653.2
  Top Layer w10: P1.SIG6 3315,1900 3221.93,1993.07 3221.93,3292.07 3244,3314.13 3244,4417 3828,5001 7864,5001 7896,4969 P10.10 7896,4471 7794,4369 7604,4369 7544,4309 EXP1.13@7544,4235.5
SW10: EXP1.14 P1.SIG8 P10.9 | length 10363.6
  Top Layer w10: v1(4170,1779) 4291,1900 P1.SIG8 ; EXP1.14@7519,4235.5 7519,4344 7596,4421 7746,4421 7796,4471 P10.9 7791,4576 7793,4578 v1(7793,4947)
  Bottom Layer w10: v1(4170,1779) 4170,1722 3832,1384 3526,1384 2918,1992 2918,4093 3827,5002 7739,5002 v1@7793.5,4947.5
SW11: EXP1.15 P2.SIG6 P10.8 | length 10814.2
  Top Layer w10: v1(3043,4071) 3043,2089 3628,1504 v1(4855,1504) ; v1(5259,1869) 5290,1900 P2.SIG6 ; EXP1.15@7493,4207.97 7493,4214.29 7494,4215.29 7494,4369 7571,4446 7671,4446 7696,4471 P10.8 7693,4574 7724,4605 v1(7724,4943)
  Bottom Layer w10: v1(3043,4071) 3043,4116 3896,4969 7698,4969 v1(7724,4943) ; v1@4846.5,1497.5 5183,1834 5224,1834 v1(5259,1869)
SW12: EXP1.16 P2.SIG8 P10.7 | length 11794.9
  Top Layer w10: v1(2971,3803) 2971,2009 3538,1442 v1(3721,1442) ; v1(3356,4317) 3356,4436 3863,4943 7575,4943 7596,4922 P10.7 7596,4491 7576,4471 7546,4471 7469,4394 7469,4225.64 7468,4224.64 EXP1.16@7468,4218.32 ; v1(3972,1597) 6008,1597 v1(6011,1594) ; v1@6146,1823 6223,1900 P2.SIG8
  Bottom Layer w10: v1(2971,3803) 3356,4188 v1(3356,4317) ; v1@3715,1437 3720.5,1442.5 3792.5,1442.5 3947,1597 v1(3972,1597) ; v1(6011,1594) 6137,1720 v1(6137,1823)
SW13: EXP1.17 P3.SIG6 P10.6 | length 11605.5
  Top Layer w10: EXP1.17 7444,4236 7444,4419 7496,4471 P10.6 7501,4576 v1(7501,4900) ; P3.SIG6 7467.05,1878.7 7467.05,1842.94 7936.99,1373 10756,1373 11309,1926 11309,4536 10940,4905 8080,4905 v1(8079,4904)
  Bottom Layer w10: v1(7501,4900) 7501,4891 7508,4898 8073,4898 v1(8079,4904)
SW14: EXP1.18 P3.SIG8 P10.5 | length 11324.1
  Top Layer w10: v1(7393,4861) 7393,4574 P10.5 7396,4491 7418.5,4468.5 EXP1.18 ; v1(8137,1803) 8234,1900 P3.SIG8
  Bottom Layer w10: v1(7393,4861) 7483.43,4861 7484.43,4860 10982,4860 11306,4536 11306,1926 10756,1376 8353,1376 8137,1592 v1(8137,1803)
SW15: EXP1.19 P4.SIG6 P10.4 | length 9857.7
  Top Layer w10: v1(7296,4814) P10.4 7296,4555.65 7393.5,4458.14 EXP1.19 ; v1(9198,1900) P4.SIG6
  Bottom Layer w10: v1(7296,4814) 10735,4814 11227,4322 11227,1996 10677,1446 9455,1446 9198,1703 v1(9198,1900)
SW16: EXP1.20 P4.SIG8 P10.3 | length 7678.7
  Top Layer w10: v1(7194,4754) 7194,4573 P10.3 7226,4571 7368.5,4428.5 EXP1.20 ; v1(10356,2174) 10400,2130 P4.SIG8
  Bottom Layer w10: v1(7194,4754) 10587,4754 11111,4230 11111,2459 10946,2294 10476,2294 v1(10356,2174)
pads on no net: DRV4.11 DRV4.12 P1.1 P2.1 P3.1 P4.1 P9.2 P10.2

## Polygon pours and split planes (outlines as drawn)
GND on Top Layer "Copper Pour Top" (solid, pour order 3): 2559.06,5118.11 2559.06,1279.53 11614.17,1279.53 11614.17,5118.11
GND on Bottom Layer "Copper Pour Bot" (solid, pour order 5): 2559.06,5118.11 2559.06,1279.53 11614.17,1279.53 11614.17,5118.11

## Keep-outs
Keep-Out Layer:
  the board outline again, w10

## Other copper
Top Layer:
  rectangle net 3.3V: 5513,4172 5730,4531
  rectangle net 12V: 6114,4175 6331,4532
Bottom Layer:
  text "GatorSynth Step Sequencer" at 8151,4302 h60
  text "Interface Portion Prototype" at 8119,4139 h60
  text "Kurt / Yilmaz" at 9082,3858 h60
  text "Kyle  / Griffey" at 8261,3828 h60

## Text inside footprints (layer, text, board x,y; h text height)
EXP1: Top Overlay "*" at 7269.58,3993.76 h73.82 r90; Mechanical 1 "*" at 7296.74,4044.93 h73.82 r90
P1: Mechanical 2 "C1" at 3660.16,2924.37 h62; Mechanical 2 "C2" at 4644.41,2924.37 h62; Mechanical 2 "C3" at 3660.16,1940.12 h62; Mechanical 2 "C4" at 4644.41,1930.27 h62
P2: Mechanical 2 "C4" at 6614.41,1930.27 h62; Mechanical 2 "C3" at 5630.16,1940.12 h62; Mechanical 2 "C2" at 6614.41,2924.37 h62; Mechanical 2 "C1" at 5630.16,2924.37 h62
P3: Mechanical 2 "C1" at 7600.16,2924.37 h62; Mechanical 2 "C2" at 8584.41,2924.37 h62; Mechanical 2 "C3" at 7600.16,1940.12 h62; Mechanical 2 "C4" at 8584.41,1930.27 h62
P4: Mechanical 2 "C4" at 10554.41,1930.27 h62; Mechanical 2 "C3" at 9570.16,1940.12 h62; Mechanical 2 "C2" at 10554.41,2924.37 h62; Mechanical 2 "C1" at 9570.16,2924.37 h62